# EAGLE board regulator_board (EAGLE 9.6.2)
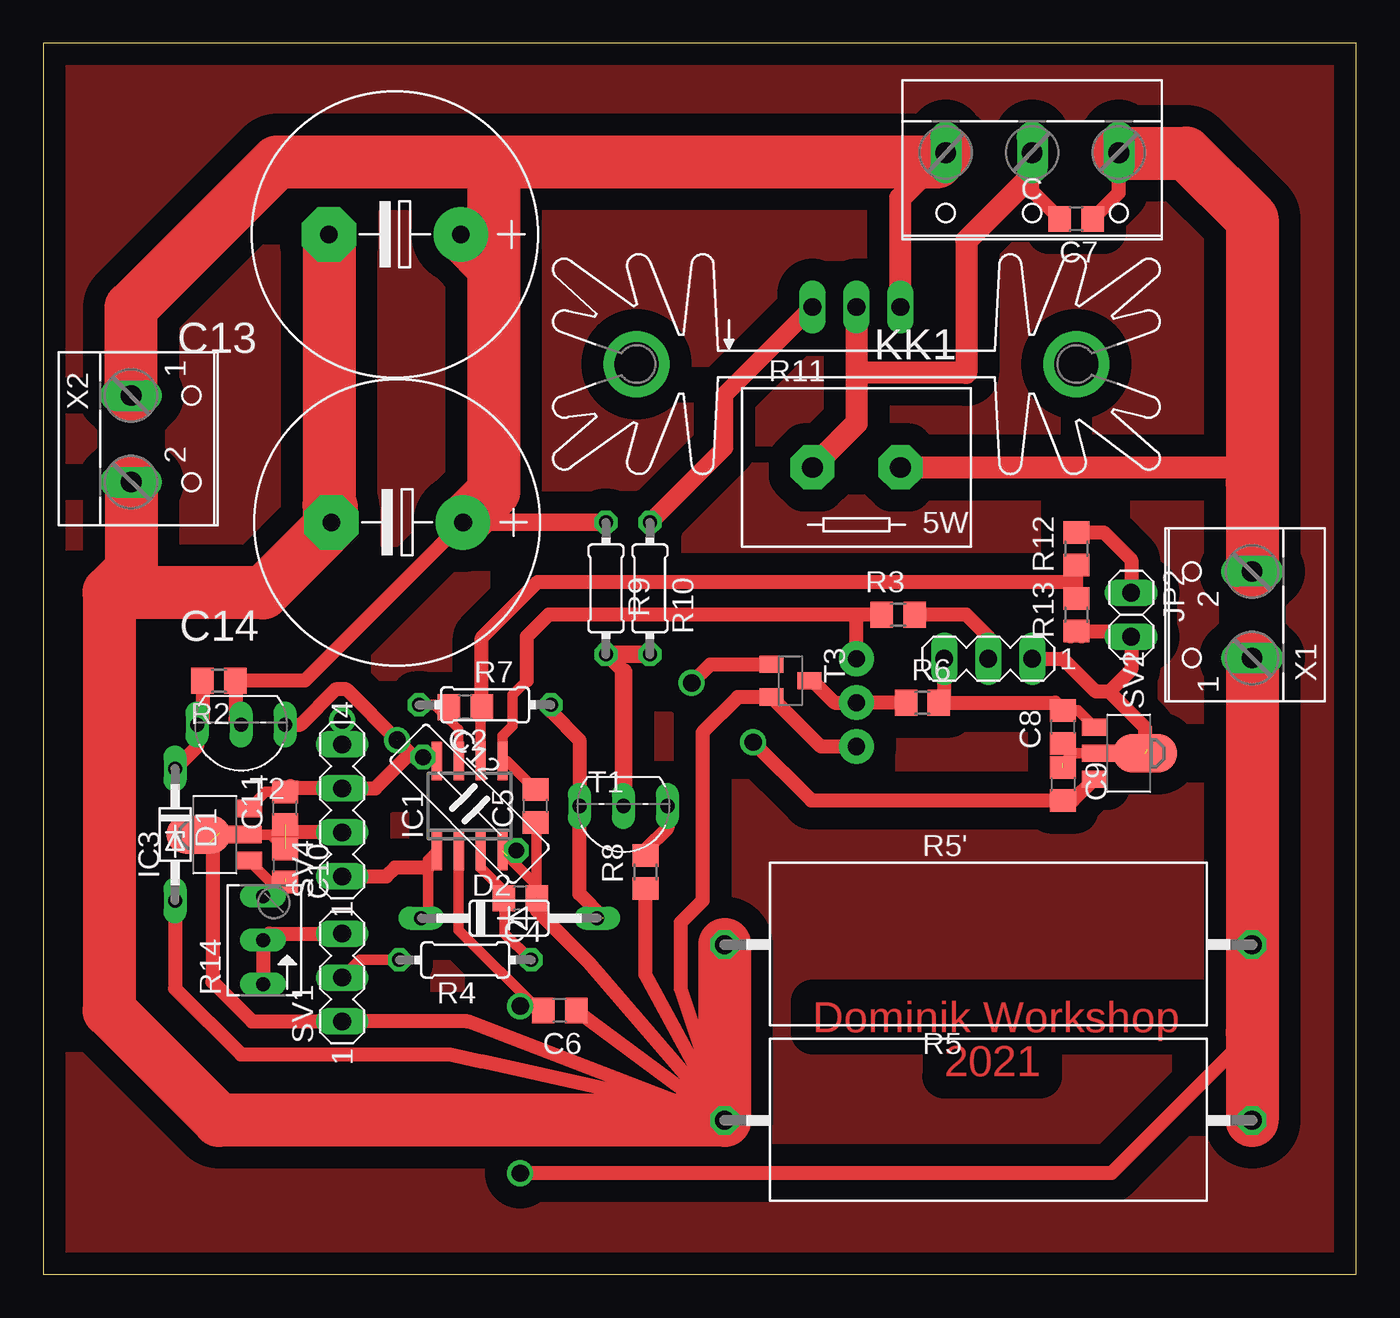
[diagram p0: board, top side]
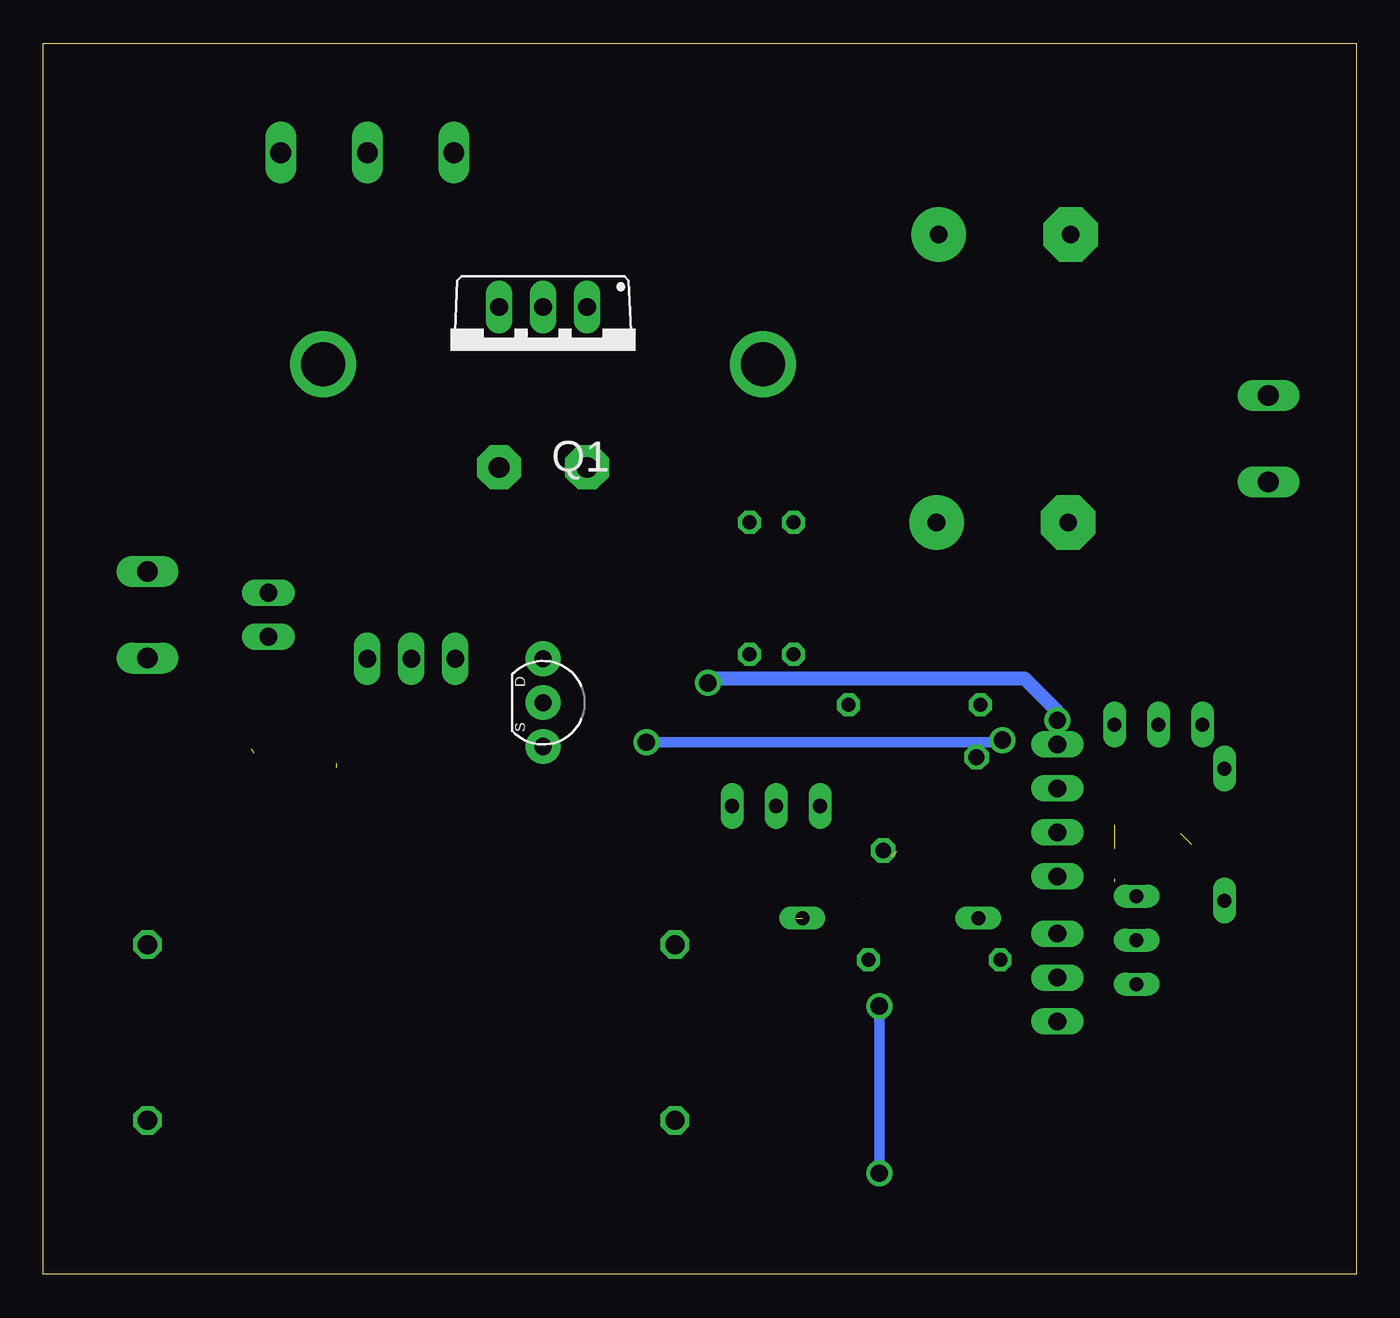
[diagram p1: board, bottom side, seen from below]

Size 75.87 x 71.11 mm. Coordinates in mm from the lower left corner, seen from the top.
Outline: 0,0 75.87,0 75.87,71.11 0,71.11 0,0
Copper layers (1*16): Top 0.035mm / dielectric 1.5mm / Bottom 0.035mm
Design rules "default": minimum track width 6mil, minimum drill 0.35mm, track to track 6mil, track to pad 6mil, pad to pad 6mil, via to via 6mil, smd to smd 6mil, copper to edge 40mil, drill to drill 6mil, minimum pad ring 10mil, minimum via ring 8mil, stop-mask expansion 4mil, vias tented up to drill 0mil, thermal gap 10mil

## Footprints (pad centres in the part's own frame; a part is rotated, then mirrored left to right if it is on the bottom)
W237-103 = drill 1.194 long: 1 -5,-1.29; 2 0,-1.29; 3 5,-1.29
C0805 = smd 1.3 x 1.5: 1 -0.95,0; 2 0.95,0
C075-032X103 = drill 0.914 octagon: 1 -3.81,0; 2 3.81,0
E7,5-16 = drill 1.016 pad 3.15: + -3.81,0 | drill 1.016 pad 3.15 octagon: - 3.81,0
DO34Z7 = drill 0.813 long: A 3.81,0; C -3.81,0
DO35-10 = drill 0.813 long: A 5.08,0; C -5.08,0
SO08 = smd 0.6 x 2.2: 1 -1.905,-2.6; 2 -0.635,-2.6; 3 0.635,-2.6; 4 1.905,-2.6; 5 1.905,2.6; 6 0.635,2.6; 7 -0.635,2.6; 8 -1.905,2.6
SOT89 = smd 1 x 1.5: 1 -1.499,-1.981; 3 1.499,-1.981 | smd 1 x 2: 2 0,-1.727 | smd 2.2 x 3.7: 2@1 0,0.94
1X02 = drill 1.016 long: 1 -1.27,0; 2 1.27,0
SK104-PAD = drill 2.54 pad 3.81: K1 -12.7,-0.762; K2 12.7,-0.762
TO220BV = drill 1.016 long: D 0,-2.54; G -2.54,-2.54; S 2.54,-2.54
SOT54ES = drill 1 pad 2: D -2.54,0; G 0,0; S 2.54,0
R0805 = smd 1.3 x 1.5: 1 -0.95,0; 2 0.95,0
0204/7 = drill 0.813 octagon: 1 -3.81,0; 2 3.81,0
VTA52 = drill 1.1 octagon: 1 -15.24,0; 2 15.24,0
MNS-5 = drill 1.194 pad 2.54 octagon: 1 -2.54,0; 2 2.54,0
B64Y = drill 0.813 long: A 2.54,0; E -2.54,0; S 0,0
MA03-1 = drill 1.016 long: 1 -2.54,0; 2 0,0; 3 2.54,0
MA04-1 = drill 1.016 long: 1 -3.81,0; 2 -1.27,0; 3 1.27,0; 4 3.81,0
TO92-ECB = drill 0.813 long: B 2.54,0; C 0,0; E -2.54,0
SOT23-BEC = smd 1 x 1.4: B -0.95,-1.1; C 0,1.1; E 0.95,-1.1
W237-102 = drill 1.194 long: 1 -2.5,-1.27; 2 2.5,-1.27

## Placement (x,y rotation side)
C  [W237-103]  57.15,63.5 180 top
C2  1n  [C0805]  24.38,32.77 180 top
C4  100n  [C0805]  27.56,21.72 180 top
C5  100n  [C0805]  28.45,27.05 90 top
C6  100n  [C0805]  29.84,15.24 180 top
C7  100nF  [C0805]  59.69,60.96 180 top
C8  100n  [C0805]  58.93,31.62 90 top
C9  100n  [C0805]  58.93,28.32 270 top
C10  100n  [C0805]  13.97,23.62 270 top
C11  100n  [C0805]  13.97,26.92 90 top
C12  100n  [C075-032X103]  24.64,27.18 315 top
C13  1000u  [E7,5-16]  20.32,60.07 180 top
C14  1000u  [E7,5-16]  20.45,43.43 180 top
D1  15V  [DO34Z7]  7.62,25.4 270 top
D2  BAT42  [DO35-10]  26.92,20.57 0 top
IC1  LM358D  [SO08]  24.64,27.05 0 top
IC2  78L05F  [SOT89]  62.74,30.1 270 top
IC3  78L05F  [SOT89]  9.91,25.4 90 top
JP2  [1X02]  62.87,38.1 270 top
KK1  SK104-PAD  [SK104-PAD]  46.99,53.34 0 top
Q1  IRF9530  [TO220BV]  46.99,53.34 180 bottom
Q3  BS170  [SOT54ES]  46.99,33.02 270 bottom
R2  4k7  [R0805]  10.16,34.29 180 top
R3  10k  [R0805]  49.4,38.1 0 top
R4  2k  [0204/7]  24.38,18.16 180 top
R5  0R1  [VTA52]  54.61,8.89 0 top
R5'  0R1  [VTA52]  54.61,19.05 0 top
R6  [R0805]  50.8,33.02 0 top
R7  5k6  [0204/7]  25.53,32.89 0 top
R8  1k  [R0805]  34.8,23.24 90 top
R9  1k  [0204/7]  32.51,39.62 270 top
R10  1k  [0204/7]  35.05,39.62 270 top
R11  6R8  [MNS-5]  46.99,46.61 0 top
R12  47k  [R0805]  59.69,41.91 270 top
R13  10k  [R0805]  59.69,38.1 270 top
R14  [B64Y]  12.7,19.3 90 top
SV1  [MA03-1]  17.27,17.14 90 top
SV2  [MA03-1]  54.61,35.56 180 top
SV4  [MA04-1]  17.27,26.8 90 top
T1  bc639  [TO92-ECB]  33.53,27.05 180 top
T2  bc639  [TO92-ECB]  11.43,31.75 180 top
T3  [SOT23-BEC]  43.18,34.29 270 top
X1  [W237-102]  68.58,38.1 90 top
X2  [W237-102]  6.35,48.26 270 top

## Library data of the parts
C = con-wago-500; MPN: 237-103; OC_FARNELL: unknown; OC_NEWARK: 18M7116
C2 C4-C14 = rcl; SPICEPREFIX: C
D1 D2 = diode
IC1-IC3 = linear
JP2 = pinhead
KK1 = heatsink
Q1 = transistor-power
Q3 = BS170; AVAILABILITY: In Stock; DESCRIPTION: N-Channel 60V 500mA (Ta) 830mW (Ta) Through Hole TO-92-3; MF: ON Semiconductor; MP: BS170; PACKAGE: TO-92 NTE Electronics; PRICE: None
R2-R5 R5' R6-R10 R12 R13 = rcl; SPICEPREFIX: R
R11 = resistor-power; OC_FARNELL: unknown; OC_NEWARK: unknown
R14 = pot
SV1 SV2 SV4 = con-lstb; OC_FARNELL: unknown; OC_NEWARK: unknown
T1-T3 = transistor
X1 X2 = con-wago-500; MPN: 237-102; OC_FARNELL: unknown; OC_NEWARK: 70K9898

## Nets
GND: C8.1 C9.1 IC2.2 IC2.2@1 JP2.2 R13.2 SV2.1
ISET: C10.2 IC3.1 R14.A
N$1: D2.C IC1.1 SV4.1
N$2: C5.2 IC1.5 Q3.D R3.1
N$3: C4.2 IC1.3 R4.1
N$4: C2.2 IC1.7 R7.1
N$5: D2.A R7.2 T1.B
N$6: R8.2 T1.E
N$7: C2.1 IC1.6 R12.2 R13.1
N$8: R3.2 SV2.2
N$9: C7.2 C.2 Q1.D R11.1
N$10: C7.1 C.1 R11.2 X1.2
N$11: R14.E R14.S SV1.3
N$12: R4.2 SV1.2
N$13: D1.C R2.2 T2.B
N$14: Q3.G R6.1 T3.C
N$15: Q1.G R10.1
N$16: SV4.4 T3.B
N$17: R9.2 R10.2 T1.C
N$18: JP2.1 R12.1
N$19: C6.2 IC1.2 R5'.2 R5.2 X1.1
V+: C9.2 C11.2 C12.1 IC1.8 IC2.3 IC3.3 SV4.3 T2.E
V-: C4.1 C5.1 C6.1 C10.1 C11.1 C12.2 C13.- C14.- D1.A IC1.4 IC3.2 IC3.2@1 Q3.S R5'.1 R5.1 R8.1 SV1.1 SV4.2 T3.E X2.2
VIN: C13.+ C14.+ C.3 Q1.S R2.1 R9.1 T2.C X2.1
VSET: C8.2 IC2.1 R6.2 SV2.3

## Tracks (layer width: path | path; a pad name or v marks a point on that pad's centre or on a via)
GND  (2 unrouted)
  Top 0.61: 63.44,30.33 63.82,30.33 | 59.5,30.1 58.93,29.52 | C8.1 59.5,30.1 | 59.5,30.1 IC2.2 61.08,30.04 61.14,30.1 IC2.2@1
  Top 0.813: 59.37,36.83 R13.2 | R13.2 60.01,36.83 | SV2.1 58.93,35.56 60.83,33.66 61.59,33.66 | R13.2 62.55,37.15 JP2.2 62.87,34.92 61.59,33.66 | IC2.2@1 63.68,31.57 61.59,33.66
ISET  (1 unrouted)
  Top 0.61: IC3.1 13.12,22.67 14.23,22.67 | C10.2 13.78,22.86
  Top 0.813: 13.97,22.86 12.95,21.84 R14.A 13.53,22.67 14.23,22.67
N$1
  Top 0.61: IC1.1 22.23,23.94 22.23,23.5 22.23,20.95 D2.C
  Top 0.813: 22.23,23.5 20.32,23.5 19.81,22.99 SV4.1
N$2
  Top 0.61: C5.2 26.8,29.65 IC1.5 26.54,31.11 27.11,31.69 27.11,33.47 27.94,34.29
  Top 0.813: 27.94,34.29 27.94,36.83 29.21,38.1 46.99,38.1 | R3.1 46.99,38.1 | Q3.D 46.99,38.1
N$3
  Top 0.508: IC1.3 25.27,23.5 | C4.2 26.61,22.16
  Top 0.61: 26.61,22.16 25.27,23.5 | C4.2 26.67,21.66 26.67,19.68 R4.1
N$4
  Top 0.508: 23.37,32.13 24,31.5 IC1.7
  Top 0.61: C2.2 23.43,32.2 23.37,32.13 | 23.37,32.13 23.43,32.07 | R7.1 22.61,32.89 23.37,32.13
N$5  (1 unrouted)
  Top 0.508: R7.2 29.34,32.51
  Top 0.813: 32.38,20.57 30.99,21.97 T1.B 30.99,30.86 29.34,32.51
N$6
  Top 0.813: T1.E 36.07,25.78 34.8,24.51 R8.2
N$7
  Top 0.61: IC1.6 25.27,32.83 C2.1 | 59.37,40.64 R12.2
  Top 0.813: C2.1 25.33,36.76 28.57,40.01 59.69,40.01 | R13.1 59.69,40.01 | 59.69,40.01 R12.2
N$8
  Top 0.813: SV2.2 54.61,36.83 53.34,38.1 R3.2
N$9
  Top 0.813: C7.2 57.15,62.55 C.2
  Top 1.27: C7.2 | Q1.D 46.99,52.07 | C.2 57.15,63.52 53.34,59.71 53.34,52.07 46.99,52.07 | 46.99,52.07 46.99,49.15 R11.1
N$10
  Top 0.813: C7.1 62.15,62.47 C.1 | X1.2 69.81,40.64
  Top 1.27: R11.2 68.96,46.61 69.85,45.72
  Top 2.54: C.1 62.17,64.77
  Top 3.048: 62.17,64.77 66.04,64.77 69.85,60.96 69.85,45.72 X1.2
N$11
  Top 0.813: R14.E R14.S 13.08,19.68 SV1.3
N$12
  Top 0.61: R4.2 18.29,18.16 SV1.2
N$13
  Top 0.813: D1.C 8.89,30.48 T2.B 9.21,32.07 R2.2
N$14
  Top 0.813: T3.C 44.45,34.29 45.72,33.02 Q3.G R6.1
N$15
  Top 1.016: R10.1 39.37,47.75 39.37,50.8 Q1.G
N$16  (via drill 1)
  Top 0.813: v37.47,34.16 38.54,35.24 T3.B | SV4.4 v17.27,32
  Bottom 0.813: v17.27,32 17.27,32.51 19.18,34.42 37.21,34.42 v37.47,34.16
N$17
  Top 0.813: 33.53,34.8 R9.2
  Top 1.016: T1.C 33.53,34.8 | R10.2 R9.2
N$18
  Top 0.813: R12.1 61.28,42.86 62.87,41.27 JP2.1
N$19  (via drill 1)
  Top 0.61: 68.5,35.6 X1.1 | v27.56,15.49 28.64,15.49 C6.2 28.64,15.24 24,19.87 IC1.2
  Top 0.813: v27.56,5.84 61.72,5.84 69.85,13.97 | 69.18,35.6 X1.1
  Top 3.048: R5.2 69.85,13.97 R5'.2 X1.1
  Bottom 0.61: v27.56,15.49 v27.56,5.84
PLANE
  pour Top (isolate 1.27): 0,71.12 76.2,71.12 76.2,0 0,0
V+  (via drill 1 pad 0.13)  (1 unrouted)
  Top 0.61: C12.1 22.16,29.65 IC1.8 | IC3.3 12.86,27.87 C11.2 | C9.2 59.5,27.37 | 60.73,28.6 IC2.3
  Top 0.813: C12.1 21.44,29.87 21.21,30.1 | 21.21,30.1 v20.45,30.86 17.53,33.78 16.89,33.78 14.86,31.75 T2.E | 60.73,28.6 59.5,27.37 44.38,27.37 v41.02,30.73 | 14.29,28.19 C11.2 14.16,28.07 SV4.3 19.18,28.07 21.21,30.1
  Bottom 0.61: v41.02,30.73 20.57,30.73 v20.45,30.86
V-  (4 unrouted)
  Top 0.508: R8.1 34.8,21.97
  Top 0.61: IC1.4 28.51,22.48 C4.1 | C4.1 28.51,21.02 | C5.1 28.51,26.04 C4.1 | IC3.2@1 9.53,24.84 | IC3.2 13.14,25.4 C10.1 | C12.2 27.01,24.16 26.83,24.16 | 39.01,9.25 R5.1 | 39.37,10.16 R5.1 | R5.1 38.7,8.89 | R5.1 38.62,9.64
  Top 0.813: 28.51,21.02 31.5,18.03 R5.1 | C11.1 13.97,25.4 14.1,25.53 SV4.2 | D1.A 7.62,16.51 11.43,12.7 23.5,12.7 25.31,12.3 39.01,9.25 | R8.1 34.8,17.31 R5.1 | IC3.2@1 9.78,24.59 9.78,16.89 12.06,14.61 SV1.1 24.51,14.61 R5.1 | 10.16,25.48 10.16,25.4 IC3.2 | 38.67,8.89 R5.1 | C6.1 R5.1 | Q3.S 44.94,30.48 T3.E 40.13,33.34 38.1,31.31 38.1,21.59 36.83,20.32 36.83,16.51 R5.1
  Top 3.048: X2.2 5.08,40.68 3.81,39.41 3.81,39.37 | 3.81,39.37 3.81,15.24 10.16,8.89 R5.1 R5'.1 | C13.- 16.51,44.45 | 16.51,44.45 16.51,43.18 12.7,39.37 3.81,39.37 | C14.- 16.64,44.32 16.51,44.45
VIN
  Top 0.813: T2.C 11.11,32.07 R2.1 15.11,34.29 C14.+
  Top 1.016: R9.1 C14.+
  Top 1.27: Q1.S 49.53,62.17 51.62,64.26
  Top 3.048: 26.04,64.26 13.5,64.26 5.08,55.84 X2.1 | C13.+ 26.04,58.17 | 26.04,58.17 26.04,45.21 C14.+ | 26.04,64.26 26.04,58.17 | 26.04,64.26 51.62,64.26 C.3
VSET
  Top 0.61: IC2.1 59.78,32.57 C8.2
  Top 0.813: SV2.3 52.07,33.34 R6.2 58.48,33.02 C8.2

## Text on the board
Top: Dominik Workshop | 2021